# Altium PCB IDC_BNC_Adapter.PCBDOC
Units mil, origin at the board's own origin, x right, y up, seen from the top; angles counter-clockwise.
Board outline 2161.81 x 3942.37 mil, 4 copper layers (TopLayer, Internal Plane 2, Signal Layer 1, BottomLayer), stack 61.54 mil thick; 67 components, 53 nets, 158 pads, 33 vias.
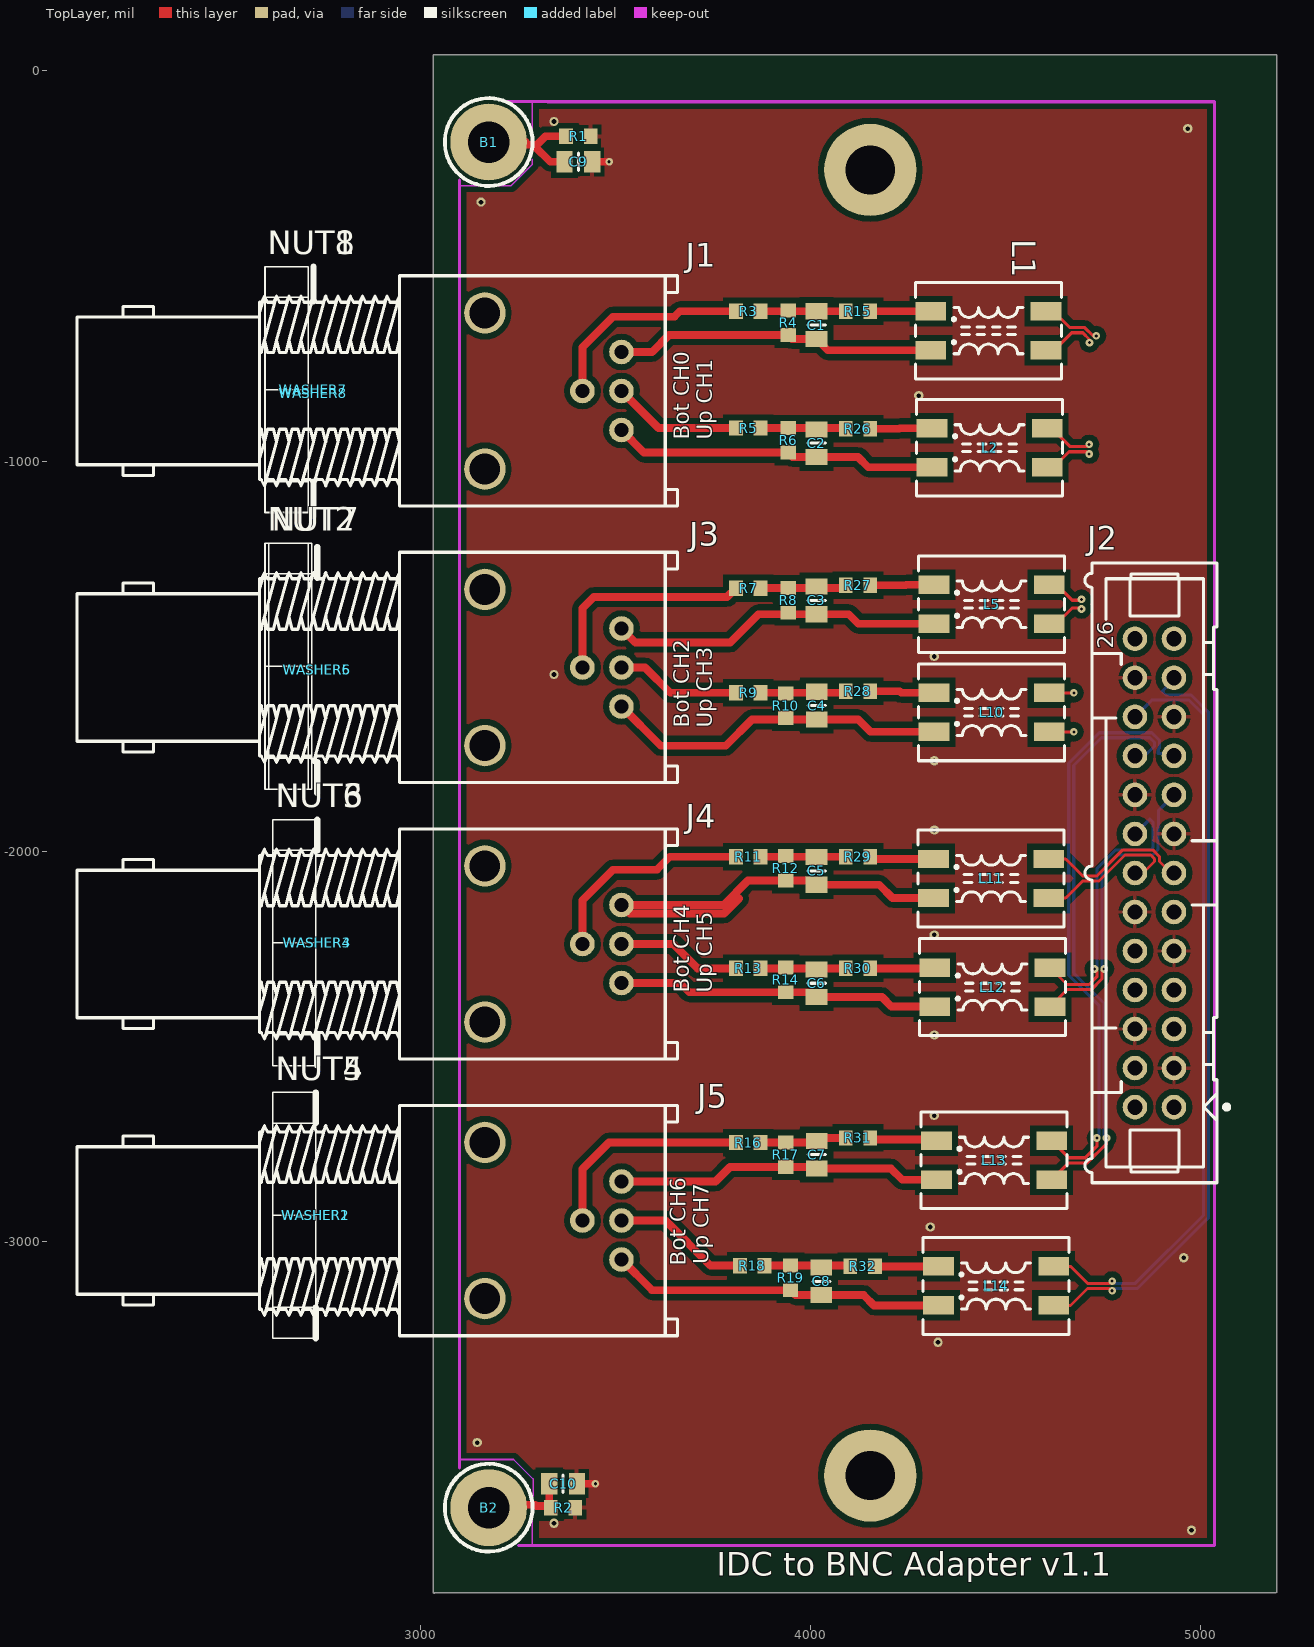
[diagram p0: TopLayer view]
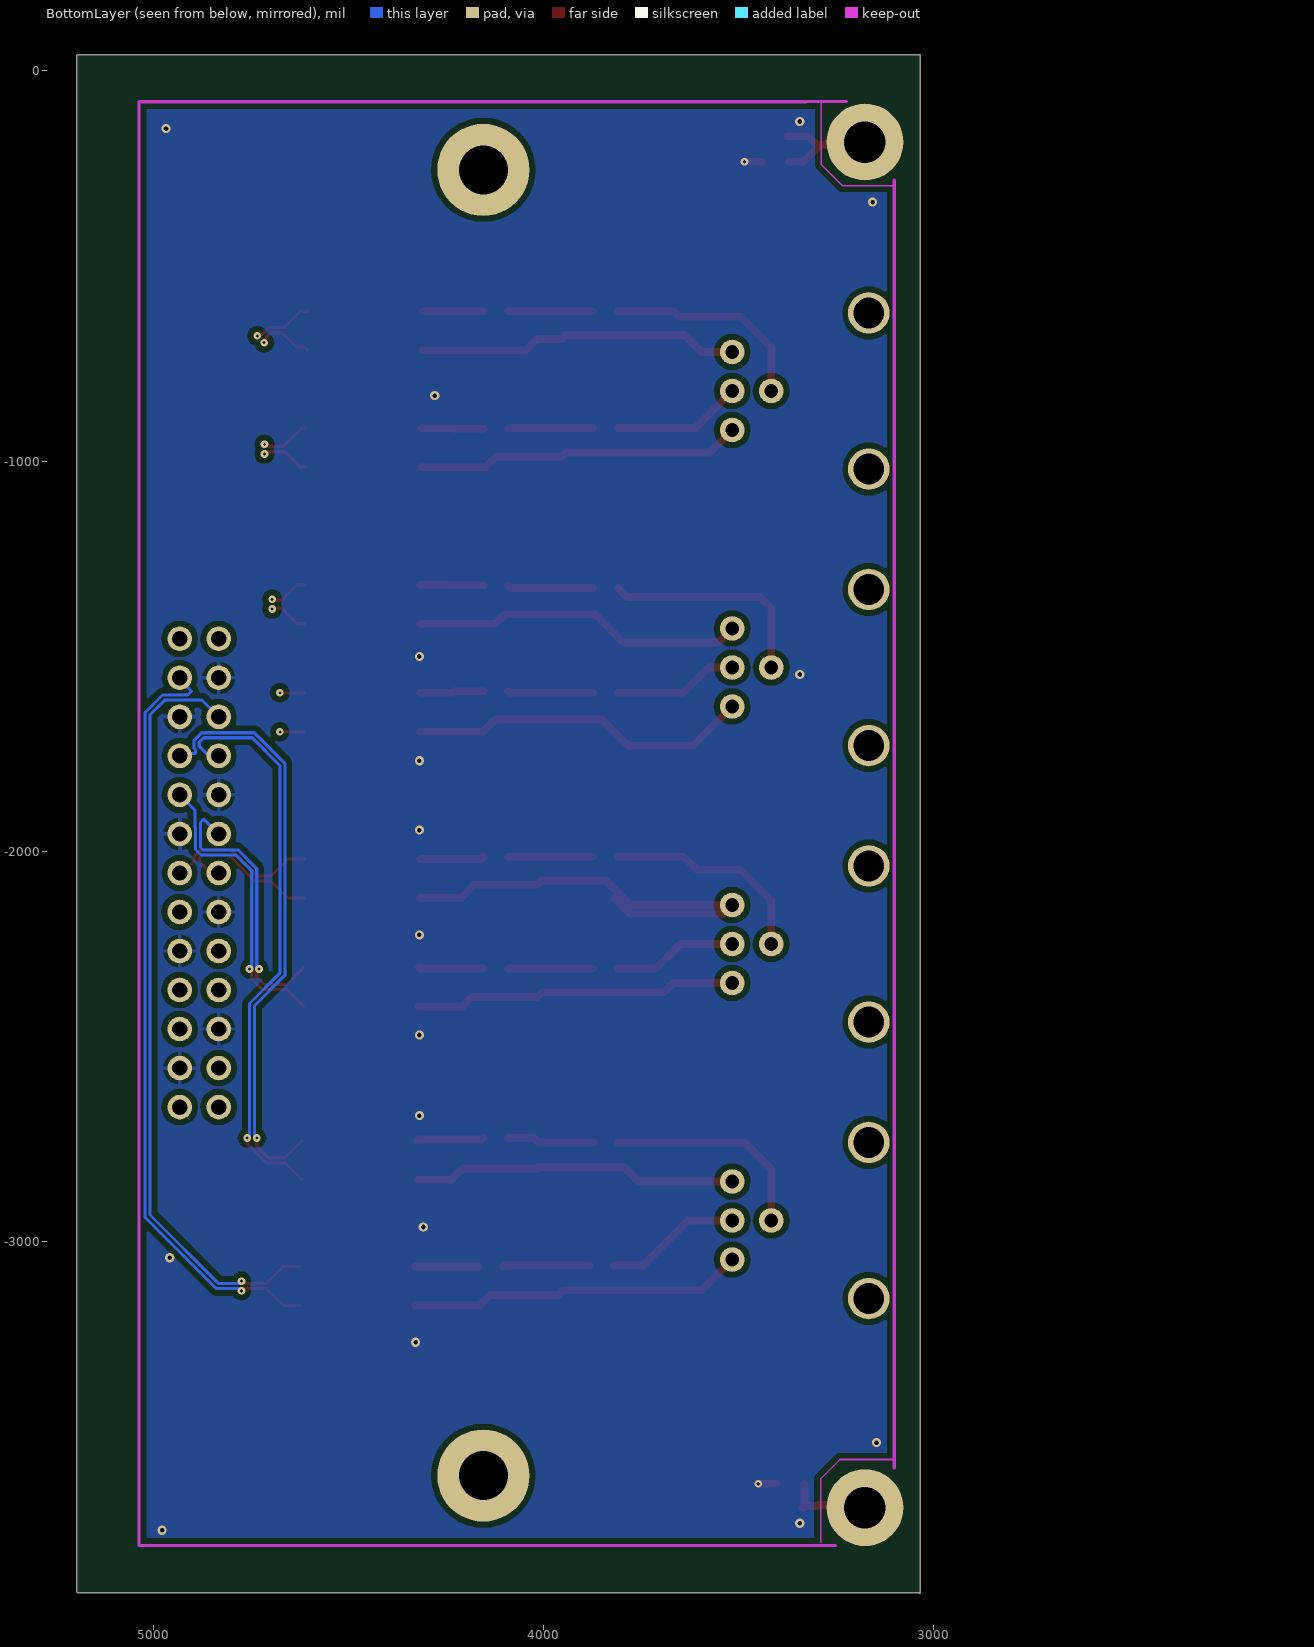
[diagram p1: BottomLayer view, seen from below]
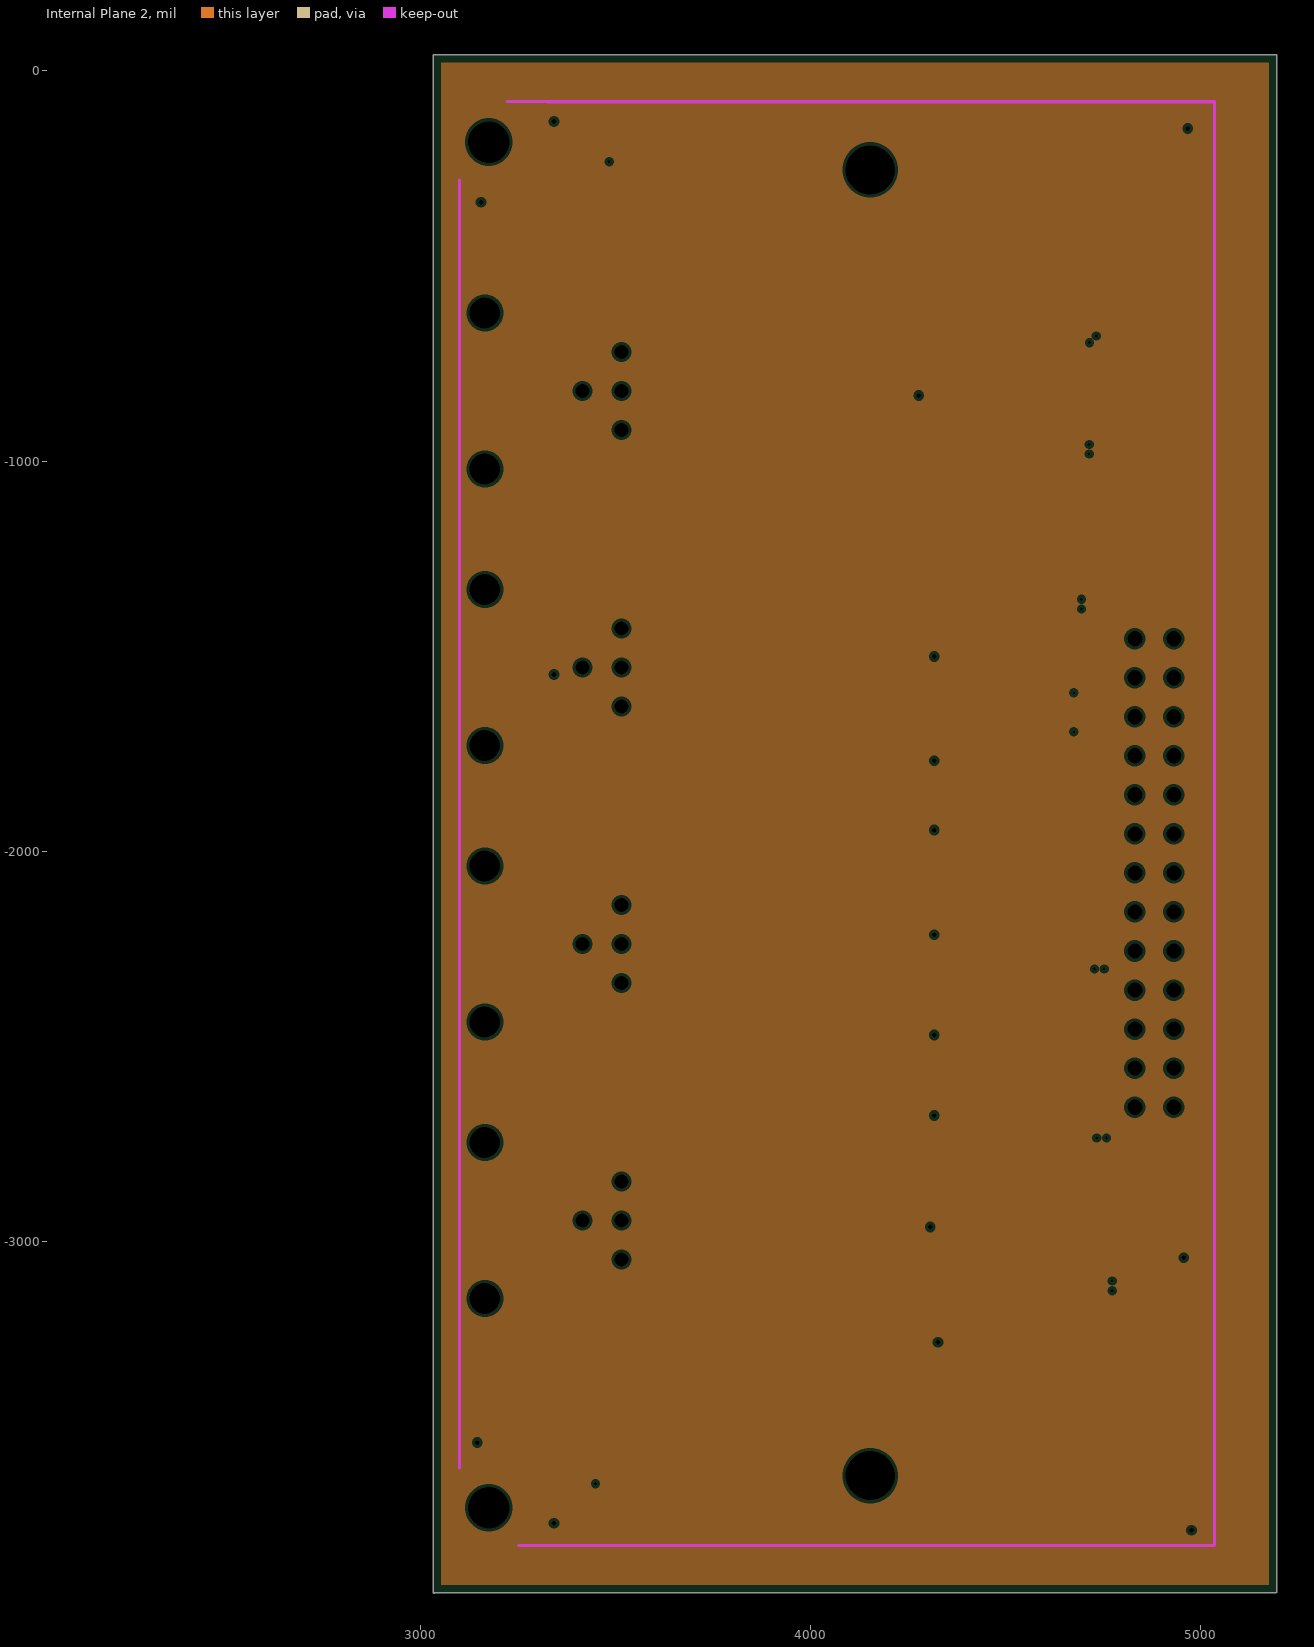
[diagram p2: Internal Plane 2, clearances drawn from the general rule]
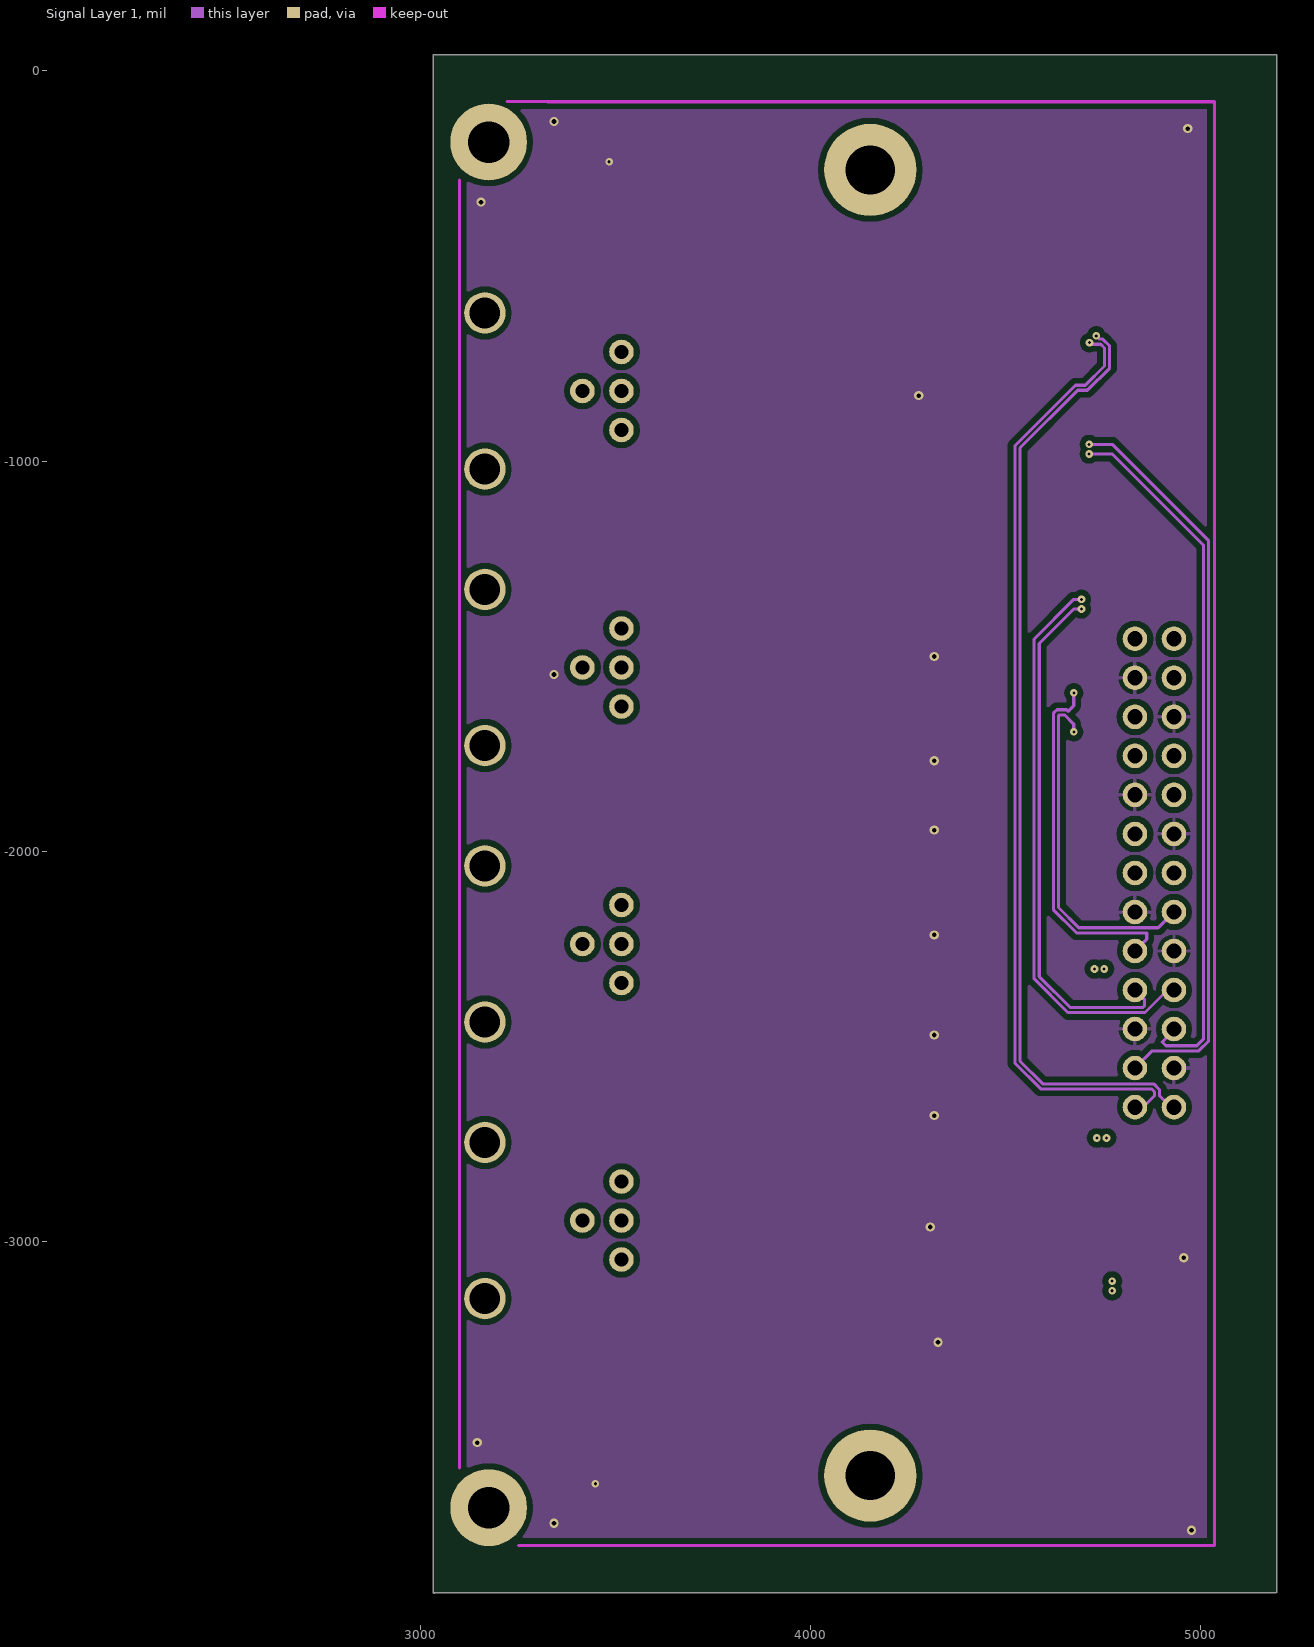
[diagram p3: Signal Layer 1]

## Layer stack, top to bottom
TopSolder: solder mask 0.4, Solder Resist, Dk 3.5
TopLayer: signal copper 1.4
Dielectric1: core 14.1732, FR-4, Dk 4.8
Internal Plane 2: plane copper 1.4169
Dielectric 3: prepreg 27.5591, Dk 4.2
Signal Layer 1: signal copper 1.4173
Dielectric 5: core 14.1732, Dk 4.2
BottomLayer: signal copper 1.4
BottomSolder: solder mask 0.4, Solder Resist, Dk 3.5

## Board outline
3033.55,-3899.4 3033.55,37.6 cw(c3035.54,37.6) 3033.68,38.3 cw(c3035.54,39) 3035.54,40.99 5193.38,40.99 cw(c5193.38,39) 5195.36,39 5195.36,-3898 cw(c5193.38,-3898) 5193.38,-3899.98 3037.43,-3899.98 cw(c3035.54,-3899.4)

## Design rules (kind name [scope] priority, off if disabled: settings)
Clearance Clearance_DIFF [(InDifferentialPairClass('All Differential Pairs')and IsTrack ) vs (InDifferentialPairClass('All Differential Pairs') and IsTrack  )] p1 off: gap=20 ignorepadtopadclearanceinfootprint=FALSE except(0: Arc-Hole Track-Hole SMDPad-Hole THPad-Hole Via-Hole Fill-Hole Poly-Hole Region-Hole Text-Hole; 5: SMDPad-SMDPad SMDPad-THPad SMDPad-Via SMDPad-Fill SMDPad-Poly SMDPad-Region SMDPad-Text THPad-THPad THPad-Via THPad-Fill THPad-Poly THPad-Region THPad-Text Via-Via Via-Fill Via-Poly Via-Region Via-Text)
Clearance [All] p2: gap=5 ignorepadtopadclearanceinfootprint=FALSE except(0: Arc-Hole Track-Hole SMDPad-Hole THPad-Hole Via-Hole Fill-Hole Poly-Hole Region-Hole Text-Hole; 15: Arc-Poly Track-Poly SMDPad-Poly THPad-Poly Via-Poly Fill-Poly Poly-Poly)
ComponentClearance [All] p1: gap=0 collisioncheckmode=3 verticalgap=100000 showdistances=FALSE
DiffPairsRouting [All] p1: maxlimit=6 minlimit=5 mostfreqgap=6 toplayer_minwidth=5 toplayer_maxwidth=6 toplayer_prefwidth=6 midlayer1_minwidth=5 midlayer1_maxwidth=6 midlayer1_prefwidth=6 bottomlayer_minwidth=5 bottomlayer_maxwidth=6 bottomlayer_prefwidth=6 maxuncoupledlength=500
FabricationTestPointUsage TestPointUsage [All] p1: valid=0 allowmultiple=FALSE
FabricationTestpoint Testpoint [All] p1: side=3 testpointundercomponent=TRUE minsize=40 maxsize=100 preferedsize=60 minholesize=20 maxholesize=40 preferedholesize=32 testpointgrid=1 allowsidetop=TRUE allowsidebottom=TRUE usegrid=TRUE gridtolerance=0.01
Height [All] p1: minheight=0 maxheight=1574.8 prefheight=1574.8
HoleSize [All] p1: absolutevalues=TRUE maxlimit=150 minlimit=1 maxpercent=80.000 minpercent=20.000
HoleToHoleClearance [All] p1: gap=1 allowstackedmicrovias=TRUE
MinimumSolderMaskSliver [All] p1: minsoldermaskwidth=0
PlaneClearance [All] p1: clearance=7.87
PlaneConnect [All] p1: planeconnectstyle=Direct reliefexpansion=20 reliefentries=4 reliefconductorwidth=10 reliefairgap=10
PolygonConnect PolygonConnect_pad [(InPadClass('All Pads'))] p1: connectstyle=Relief reliefconductorwidth=10 reliefentries=4 polygonreliefangle="90 Angle" airgapwidth=10
PolygonConnect [All] p2: connectstyle=Direct reliefconductorwidth=10 reliefentries=4 polygonreliefangle="45 Angle" airgapwidth=10
RoomDefinition IDC_BNC_Adapter [InComponentClass('IDC_BNC_Adapter')] p1: confinementstyle=ConfineIn formatcopy=TRUE lockcomponents=FALSE outline 4760.31,27.76 4661.88,27.76 4661.88,-612 4760.31,-612
RoutingVias [All] p1: holewidth=7.87 width=19.68 viastyle="Through Hole" minholewidth=7.87 minwidth=19.68 maxholewidth=28 maxwidth=50
SilkToSilkClearance [All] p1: silktosilkclearance=0
SilkToSolderMaskClearance SilkscreenOverComponentPads [IsPad] p1: minsilkscreentomaskgap=0 clearancetoexposedcopper=TRUE
SolderMaskExpansion [All] p1: expansion=2
ViasUnderSMD [All] p1: allowed=FALSE
Width [All] p1: maxlimit=50 minlimit=5 preferedwidth=5
18 further rules are at their usual default settings.

## Components (designator, comment, footprint, x,y, rotation, side; value= is the part's Value field where it differs from the comment)
B1 "Plated Hole" MTG270_500 3175.54,-182.4 r0 top
B2 "Plated Hole" MTG270_500 3175.54,-3682.4 r0 top locked
C1 "Undefined" CAPC2012X135N 4015.75,-651.63 r90 top
C2 "Undefined" CAPC2012X135N 4015.75,-954.19 r90 top
C3 "Undefined" CAPC2012X135N 4015.75,-1357.16 r90 top
C4 "Undefined" CAPC2012X135N 4016.08,-1626.76 r90 top
C5 "Undefined" CAPC2012X135N 4015.75,-2050.34 r90 top
C6 "Undefined" CAPC2012X135N 4015.75,-2338.34 r90 top
C7 "Undefined" CAPC2012X135N 4016.08,-2777.68 r90 top
C8 "Undefined" CAPC2012X135N 4027.9,-3102.24 r90 top
C9 "Undefined" CAPC2012X135N 3405.51,-232.85 r0 top
C10 "Undefined" CAPC2012X135N 3366.14,-3621.08 r0 top
J1 "BNC" RENHOTEC_RHT-610-0049 3271.76,-820.42 r180 top
J2 "Header 26" 3M_N2526-6003RB 4881.89,-2055.68 r90 top
J3 "BNC" RENHOTEC_RHT-610-0049 3271.75,-1529.09 r180 top
J4 "BNC" RENHOTEC_RHT-610-0049 3271.75,-2237.75 r180 top
J5 "BNC" RENHOTEC_RHT-610-0049 3271.75,-2946.41 r180 top
L1 "2x6.5mH" IND_WURTH_WE-SL2 4456.45,-666 r0 top
L2 "2x6.5mH" IND_WURTH_WE-SL2 4459.45,-966 r0 top
L5 "2x6.5mH" IND_WURTH_WE-SL2 4464.45,-1367 r0 top
L10 "2x6.5mH" IND_WURTH_WE-SL2 4464.45,-1644 r0 top
L11 "2x6.5mH" IND_WURTH_WE-SL2 4463.24,-2069.84 r0 top
L12 "2x6.5mH" IND_WURTH_WE-SL2 4466.45,-2348.19 r0 top
L13 "2x6.5mH" IND_WURTH_WE-SL2 4470.87,-2792.05 r0 top
L14 "2x6.5mH" IND_WURTH_WE-SL2 4475.87,-3114.05 r0 top
NUT1 "BNC Nut" TE_1-329631-2 2657.48,-816.93 r0 top
NUT2 "BNC Nut" TE_1-329631-2 2657.48,-1525.59 r0 top
NUT3 "BNC Nut" TE_1-329631-2 2677.17,-2234.25 r0 top
NUT4 "BNC Nut" TE_1-329631-2 2677.17,-2933.07 r0 top
NUT5 "BNC Nut" TE_1-329631-2 2677.17,-2933.07 r0 top
NUT6 "BNC Nut" TE_1-329631-2 2677.17,-2234.25 r0 top
NUT7 "BNC Nut" TE_1-329631-2 2667.32,-1525.59 r0 top
NUT8 "BNC Nut" TE_1-329631-2 2657.48,-816.93 r0 top
R1 "0" RESC1608X55N 3405.51,-167.32 r180 top
R2 "0" RESC1608X55N 3366.14,-3682.4 r180 top
R3 "0" RESC1608X55N 3840.6,-616 r0 top
R4 "Undefined" RESC1608X55N 3942.89,-645.53 r90 top
R5 "0" RESC1608X55N 3840.6,-915.43 r0 top
R6 "Undefined" RESC1608X55N 3942.89,-946.93 r90 top
R7 "0" RESC1608X55N 3840.6,-1325.66 r0 top
R8 "Undefined" RESC1608X55N 3942.89,-1357.16 r90 top
R9 "0" RESC1608X55N 3840.6,-1594 r0 top
R10 "Undefined" RESC1608X55N 3937.01,-1627.17 r90 top
R11 "0" RESC1608X55N 3840.6,-2014.08 r0 top
R12 "Undefined" RESC1608X55N 3937.34,-2043.61 r90 top
R13 "0" RESC1608X55N 3840.6,-2300.19 r0 top
R14 "Undefined" RESC1608X55N 3937.34,-2329.71 r90 top
R15 "0" RESC1608X55N 4122.05,-616 r0 top
R16 "0" RESC1608X55N 3840.6,-2746.63 r0 top
R17 "Undefined" RESC1608X55N 3937.34,-2777.68 r90 top
R18 "0" RESC1608X55N 3851.02,-3062.08 r0 top
R19 "Undefined" RESC1608X55N 3949.16,-3093.58 r90 top
R26 "0" RESC1608X55N 4122.05,-917.4 r0 top
R27 "0" RESC1608X55N 4122.05,-1318.4 r0 top
R28 "0" RESC1608X55N 4122.05,-1589.93 r0 top
R29 "0" RESC1608X55N 4122.05,-2014.08 r0 top
R30 "0" RESC1608X55N 4122.05,-2300.19 r0 top
R31 "0" RESC1608X55N 4122.05,-2734.82 r0 top
R32 "0" RESC1608X55N 4133.86,-3064.05 r0 top
WASHER1 "D15.8d12.75" TE_1-1634817-0 2732.28,-2933.07 r0 top
WASHER2 "D15.8d12.75" TE_1-1634817-0 2732.28,-2933.07 r0 top
WASHER3 "D15.8d12.75" TE_1-1634817-0 2736.22,-2234.25 r0 top
WASHER4 "D15.8d12.75" TE_1-1634817-0 2736.22,-2234.25 r0 top
WASHER5 "D15.8d12.75" TE_1-1634817-0 2736.22,-1535.43 r0 top
WASHER6 "D15.8d12.75" TE_1-1634817-0 2736.22,-1535.43 r0 top
WASHER7 "D15.8d12.75" TE_1-1634817-0 2726.38,-816.93 r0 top
WASHER8 "D15.8d12.75" TE_1-1634817-0 2726.38,-826.77 r0 top

## Footprints (in the part's own frame and the unit in brackets; to place one, negate y for a bottom-side part, rotate by r counter-clockwise, add the part's x,y. Pads: shape width x height; smd on the part's side, far side on the other; paste and mask are expansions set on the pad)
3M_N2526-6003RB [mm] "26 Contacts - Straight .100\" x .100\" Low Profile Four-Wall Header"
  round 1.6 hole 1: 1(-15.24,-1.27) 2(-15.24,1.27) 3(-12.7,-1.27) 4(-12.7,1.27) 5(-10.16,-1.27) 6(-10.16,1.27) 7(-7.62,-1.27) 8(-7.62,1.27) 9(-5.08,-1.27) 10(-5.08,1.27) 11(-2.54,-1.27) 12(-2.54,1.27) 13(0,-1.27) 14(0,1.27) 15(2.54,-1.27) 16(2.54,1.27) 17(5.08,-1.27) 18(5.08,1.27) 19(7.62,-1.27) 20(7.62,1.27) 21(10.16,-1.27) 22(10.16,1.27) 23(12.7,-1.27) 24(12.7,1.27) 25(15.24,-1.27) 26(15.24,1.27)
  silkscreen extent -20.17,-4.85 20.17,4.52, body extent -20.17,-4.11 20.17,4.52, height 9.91
CAPC2012X135N [mm] "Chip Capacitor, Body 2.0x1.25mm, IPC Medium Density"
  rect 1.05x1.4 smd: 1(-0.9,0) 2(0.9,0)
  silkscreen extent 0,-0.58 0,0.58, body extent -1.05,-0.67 1.05,0.68, height 1.25
IND_WURTH_WE-SL2 [mm] "Common Mode SMD Line Filter WE-SL2"
  rect 2x1.2 smd: 1(-3.75,1.27) 2(-3.75,-1.27) 3(3.75,-1.27) 4(3.75,1.27)
  silkscreen extent -4.75,-3.15 4.75,3.15, body extent -4.75,-3.15 4.75,3.15, height 5.3
MTG270_500 [mm] "Plated Through Hole: Hole Dia.=2.7mm Pad Dia.=5.0mm"
  round 5 hole 2.7: 1(0,0)
RENHOTEC_RHT-610-0049 [mm] "Dual Right Angle 50 Ohm BNC Jack, White Valox Case"
  round 1.6 hole 0.9: 1(-6.2,-2.54) 2(-6.2,0) 3(-6.2,2.54) 4(-3.66,0)
  round 2.7 hole 2: 6(2.69,-5.08) 7(2.69,5.08)
  silkscreen extent -9.85,-7.5 29.25,7.5, body extent -9.85,-7.5 29.25,7.5, height 29.3
RESC1608X55N [mm] "Chip Resistor, EIA 0603, Metric 1608, Body 1.6x0.8mm, IPC Medium Density"
  rect 0.9x1 smd: 1(-0.8,0) 2(0.8,0)
  body extent -0.87,-0.47 0.88,0.48, height 0.55
TE_1-329631-2 [mil]
  silkscreen extent -55,-315 55,315
TE_1-1634817-0 [mil]
  silkscreen extent 0,-315 0,315

## Part data
B1 B2: library part PLATED_HOLE2.7_PAD5.0, "Single Terminal Socket", Author="CERN DEM JMW", ComponentHeight=0mm, Component Type="Standard (No BOM)", CreateDate=27.09.2011, Family="Plated Hole", HelpURL=Undefined, LatestRevisionDate=27.09.2011, Mounted=No, PackageDescription="Plated Through Hole: Hole Dia.=2.7mm Pad Dia.=5.0mm", Part Description="Plated Through Hole: Hole Dia.=2.7mm Pad Dia.=5.0mm", Part Number=PLATED_HOLE2.7_PAD5.0, Pin Count=1, Sense=No, SMD=No, Socket=No, Status=None
C1 C2 C3 C4 C5 C6 C7 C8 C9 C10: library part CC0805_NO-VALUE, "Non-polarised capacitor", Case=0805, Manufacturer1 ComponentHeight=1.35mm, Author="CERN DEM JLC", Component Type=Standard, CreateDate=10.12.2008, HelpURL=Undefined, LatestRevisionDate=11.09.2013, Manufacturer=Undefined, Manufacturer Part Number=CC0805_NO-VALUE, Mounted=No, Part Description="Reserved Footprint For 0805(2012) Chip Ceramic Capacitor", Part Number=CC0805_NO-VALUE, Pin Count=2, Sense=No, SMD=Yes, Socket=No, Status=None
J1 J3 J4 J5: "Dual Right Angle 50 Ohm BNC Jack, White Valox Case", Manufacturer=RENHOTEC, Manufacturer Part Number=RHT-610-0049, Part Number=RENHOTEC_RHT-610-0049, Author=GK, ComponentHeight=29.3mm, Component Type=Standard, CreateDate=09.04.2013, Family=BNC, HelpURL=\\cern.ch\dfs\Applications\Altium\Datasheets\BOMAR_364A2595.pdf, LatestRevisionDate=09.04.2013, Mounted=Yes, Part Description="Dual Right Angle 50 Ohm BNC Jack, White Valox Case", Pin Count=6, PressFit=No, Sense=No, SMD=No, Socket=No, Status=None
J2: library part 3M_N2526-6003RB, "Connector 26 Male", Manufacturer=3M, Manufacturer Part Number=N2526-6003RB, Author="CERN DEM JLC", ComponentHeight=9.91mm, Component Type=Standard, CreateDate=22.01.2014, Family="Header 26", HelpURL=\\cern.ch\dfs\Applications\Altium\Datasheets\3M_N2526-6003RB.pdf, LatestRevisionDate=22.01.2014, Mounted=Yes, Part Description="26 Contacts - Straight .100'' x .100'' Low Profile Four-Wall Header, 2500 Series", Part Number=3M_N2526-6003RB, Pin Count=26, PressFit=No, Sense=No, SMD=No, Socket=No, Status=None
L1 L2 L5 L10 L11 L12 L13 L14: library part IND_6.5MH_50%_WURTH_WE-SL2-744229, "Inductor Common Mode", Manufacturer="WURTH ELEKTRONIK", Manufacturer Part Number=744229, Power=400mA, Resistance=0.95R, Tolerance=±50%, Author="CERN DEM JLC", ComponentHeight=5.3mm, Component Type=Standard, CreateDate=01.10.2012, HelpURL=\\cern.ch\dfs\Applications\Altium\Datasheets\IND_WURTH_WE-SL2_744229.pdf, LatestRevisionDate=15.10.2012, Mounted=Yes, Part Description="Common Mode SMD Line Filter (WE-SL2 Serie)", Part Number=IND_6.5MH_50%_WURTH_WE-SL2-744229, Pin Count=4, Sense=No, SMD=Yes, Socket=No, Status=None
NUT1 NUT2 NUT3 NUT4 NUT5 NUT6 NUT7 NUT8: "BNC nut", Manufacturer=TE, Manufacturer Part Number=1-329631-2, Part Number=TE_1-329631-2, Author="CERN DEM JLC", ComponentHeight=3.2mm, Component Type=Mechanical, CreateDate=17.04.2014, HelpURL=\\cern.ch\dfs\Applications\Altium\Datasheets\BOSSARD_BN81-1400428.pdf, LatestRevisionDate=17.04.2014, Mounted=Yes, PackageDescription="BNC NUT 1/2-28UNEF-2B", Part Description="BNC NUT 1/2-28UNEF-2B", Pin Count=0, PressFit=No, Sense=No, SMD=No, Socket=No, Status=None
R1 R2 R3 R5 R7 R9 R11 R13 R15 R16 R18 R26 R27 R28 R29 R30 R31 R32: library part R0603_0R_JUMPER, "Resistor", Case=0603, Manufacturer=GENERIC, Manufacturer1 ComponentHeight=0.55mm, Manufacturer1 Example="NIC COMPONENT", Manufacturer1 Part Number=NRC06Z0, Author="CERN DEM JLC", Component Type=Standard, CreateDate=03.12.2007, HelpURL=\\cern.ch\dfs\Applications\Altium\Datasheets\R0603_NIC_NRC.pdf, LatestRevisionDate=13.03.2008, Manufacturer Part Number=R0603_0R_JUMPER, Mounted=Yes, Part Description="1A (0.05R Max DC Resistance) Zero Ohm Jumper", Part Number=R0603_0R_JUMPER, Pin Count=2, Sense=No, SMD=Yes, Socket=No, Status=Preferred
  R1 R2: PressFit=No
R4 R6 R8 R10 R12 R14 R17 R19: library part R0603_NO-VALUE, "Resistor", Case=0603, Author="CERN DEM JLC", Component Type=Standard, CreateDate=03.12.2007, HelpURL=Undefined, LatestRevisionDate=13.03.2008, Manufacturer=Undefined, Manufacturer1 ComponentHeight=Undefined, Manufacturer1 Example=Undefined, Manufacturer1 Part Number=Undefined, Manufacturer Part Number=R0603_NO-VALUE, Mounted=No, Part Description="Reserved Footprint For a 0603 (1608) Chip Resistor", Part Number=R0603_NO-VALUE, Pin Count=2, PressFit=No, Sense=No, SMD=Yes, Socket=No, Status=None
WASHER1 WASHER2 WASHER3 WASHER4 WASHER5 WASHER6 WASHER7 WASHER8: "BNC Washer", Manufacturer=TE, Manufacturer Part Number=1-1634817-0, Part Number=TE_1-1634817-0, Author=GK, ComponentHeight=0.5mm, Component Type=Mechanical, CreateDate=27.04.2017, HelpURL=\\cern.ch\dfs\Applications\Altium\Datasheets\BOSSARD_BN83728-8243972.pdf, LatestRevisionDate=27.04.2017, Mounted=Yes, PackageDescription="BNC washer", Part Description="BNC washer", Pin Count=0, PressFit=No, Sense=No, SMD=No, Socket=No, Status=None

## Free pads (board coordinates)
  round 236.22 hole 125.98: 2(4153.65,-253.73) 3(4153.65,-3600.19)

## Via types
v1: diameter 23.62, hole 11.81, TopLayer to BottomLayer, tented both sides, 17 vias
v2: diameter 19.68, hole 7.87, TopLayer to BottomLayer, 16 vias

## Nets (pads, with @x,y where several pads share a name; then routed paths per layer and width w, separated by ;. In a path a pad name is that pad's centre, name@x,y a point inside that pad or via, vN(x,y) a via of type N, cw(c..) or ccw(c..) an arc to the next point about the centre after c; other vN are vias at no path point)
CH0: J1.4 R3.1 | length 543.7
  TopLayer w20: J1.4 3415.85,-708.17 3494.09,-629.92 3651.57,-629.92 3665.5,-616 R3.1
CH1: J1.2 R5.1 | length 332.6
  TopLayer w20: J1.2 3610.86,-915.43 R5.1
CH2: J3.4 R7.1 | length 566.3
  TopLayer w20: J3.4 3415.85,-1377.46 3444.88,-1348.43 3786.34,-1348.43 R7.1
CH3: J3.2 R9.1 | length 320.1
  TopLayer w20: J3.2 3576.33,-1529.09 3641.24,-1594 R9.1
CH4: J4.4 R11.1 | length 551.7
  TopLayer w20: J4.4 3415.85,-2125.49 3494.09,-2047.24 3606.7,-2047.24 3639.86,-2014.08 R11.1
CH5: J4.2 R13.1 | length 319.1
  TopLayer w20: J4.2 3648.19,-2237.75 3710.63,-2300.19 R13.1
CH6: J5.4 R16.1 | length 553.2
  TopLayer w20: J5.4 3415.85,-2814.59 3483.81,-2746.63 R16.1
CH7: J5.2 R18.1 | length 351.6
  TopLayer w20: J5.2 3628.61,-2946.41 3744.29,-3062.08 R18.1
GND: C9.2 C10.2 J2.3 J2.6 J2.9 J2.12 J2.15 J2.18 J2.21 J2.24 R1.1 R2.1 | length 90.8
  TopLayer w20: C10.2 v2(3449.01,-3621.08) ; C9.2 v2(3484.34,-232.84)
  other v1: 4976.84,-3740.52 3342.99,-3722.24 3146.14,-3515.55 4327.24,-3258.23 4957.16,-3041.7 4307.55,-2962.96 4317.4,-2677.53 4317.4,-2470.83 4317.4,-2214.33 4317.4,-1945.82 4317.4,-1768.01 3342.99,-1547.04 4317.4,-1500.86 4278.03,-832.14 3155.98,-336.41 4967,-148 3342.99,-129.72
IDC_N0: J2.2 L1.3 | length 2592.1
  TopLayer w8: L1.3 4612.83,-707.26 4633.62,-707.26 4669.83,-671.04 4698.04,-671.04 4715.36,-688.36 v2(4715.36,-696.62)
  Signal Layer 1 w8: v2(4715.36,-696.62) 4719.3,-700.57 4744.09,-700.57 4753.94,-710.41 4753.94,-756.47 4704.72,-805.68 4679.65,-805.68 4524.4,-960.93 4524.4,-2543.35 4590.23,-2609.18 4874.36,-2609.18 4881.89,-2616.7 4881.89,-2626.55 4852.75,-2655.68 J2.2
IDC_N1: J2.5 L2.3 | length 1944.7
  TopLayer w8: L2.3 4623.15,-1016 4662.99,-976.16 4708.72,-976.16 v2(4714.57,-982)
  Signal Layer 1 w8: v2(4714.57,-982) 4773.62,-982 5007.89,-1216.27 5007.89,-2480.86 4990.16,-2498.59 4911.42,-2498.59 4901.57,-2488.75 4931.89,-2458.44 J2.5
IDC_N2: J2.8 L5.3 | length 1454.3
  TopLayer w8: L5.3 4630.69,-1417 4671.14,-1376.55 4692.38,-1376.55 v2(4694.88,-1379.05)
  Signal Layer 1 w8: v2(4694.88,-1379.05) 4675.2,-1379.05 4586.61,-1467.63 4586.61,-2321.43 4665.35,-2400.17 4852.36,-2400.17 4856.69,-2395.84 4856.69,-2380.48 J2.8
IDC_N3: J2.11 L10.3 | length 959.2
  TopLayer w8: L10.3 v2(4675.2,-1694)
  Signal Layer 1 w8: v2(4675.2,-1694) 4675.2,-1674.24 4651.46,-1650.5 4637.47,-1650.5 4635.83,-1652.14 4635.83,-2144.26 4687.74,-2196.18 4891.39,-2196.18 J2.11
IDC_N4: J2.14 L11.3 | length 389.7
  TopLayer w8: L11.3 4654.25,-2119.84 4697.75,-2076.34 4739.64,-2076.34 4806.35,-2009.63 4872.05,-2009.63 4881.89,-2019.47 4881.89,-2026.15 4852.36,-2055.68 J2.14
IDC_N5: J2.17 L12.3 | length 768.9
  TopLayer w8: L12.3 4657.59,-2354.69 4719.95,-2354.69 4747.25,-2327.39 4747.25,-2307.59 v2(4753.09,-2301.74)
  BottomLayer w8: v2(4753.09,-2301.74) 4747.25,-2295.9 4747.25,-2050.34 4787.97,-2009.63 4877.43,-2009.63 4891.39,-1995.67 4891.39,-1938.91 4893.81,-1936.49 4892.6,-1935.28 4892.6,-1894.97 J2.17
IDC_N6: J2.20 L13.3 | length 1494.1
  TopLayer w8: L13.3 4662.01,-2798.55 4710.11,-2798.55 4758.94,-2749.73 v2(4758.94,-2734.82)
  BottomLayer w8: v2(4758.94,-2734.82) 4753.09,-2728.97 4753.09,-2390.32 4675.2,-2312.42 4675.2,-1780.09 4746.11,-1709.18 4870.03,-1709.18 4881.89,-1721.04 4881.89,-1730.88 4857.09,-1755.68 J2.20
IDC_N7: J2.23 L14.3 | length 1977.7
  TopLayer w8: L14.3 4666.88,-3164.05 4710.38,-3120.55 4767.78,-3120.55 v2(4773.62,-3126.4)
  BottomLayer w8: v2(4773.62,-3126.4) 4779.46,-3120.55 4838.06,-3120.55 5020.89,-2937.73 5020.89,-1644.8 4979.67,-1603.58 4975.86,-1599.77 4911.42,-1599.77 4901.57,-1589.93 4931.89,-1559.61 J2.23
IDC_P0: J2.1 L1.4 | length 2594.6
  TopLayer w8: L1.4 4623.31,-616 4665.35,-658.04 4703.42,-658.04 4724.55,-679.17 v2(4732.81,-679.17)
  Signal Layer 1 w8: v2(4732.81,-679.17) 4741.21,-687.57 4749.48,-687.57 4766.94,-705.03 4766.94,-761.85 4710.11,-818.68 4685.04,-818.68 4537.4,-966.32 4537.4,-2537.96 4595.62,-2596.18 4879.75,-2596.18 4894.89,-2611.32 4894.89,-2626.55 4924.02,-2655.68 J2.1
IDC_P1: J2.4 L2.4 | length 2037.6
  TopLayer w8: L2.4 4618.98,-916 4666.14,-963.16 4708.72,-963.16 v2(4714.57,-957.32)
  Signal Layer 1 w8: v2(4714.57,-957.32) 4773.62,-957.32 5020.89,-1204.59 5020.89,-2486.25 4995.54,-2511.59 4875.97,-2511.59 J2.4
IDC_P2: J2.7 L5.4 | length 1552.4
  TopLayer w8: L5.4 4631.28,-1317 4671.14,-1356.86 4692.38,-1356.86 v2(4694.88,-1354.36)
  Signal Layer 1 w8: v2(4694.88,-1354.36) 4675.2,-1354.36 4573.61,-1455.95 4573.61,-2326.81 4659.97,-2413.17 4857.75,-2413.17 4915.23,-2355.68 J2.7
IDC_P3: J2.10 L10.4 | length 985.7
  TopLayer w8: L10.4 v2(4675.2,-1594)
  Signal Layer 1 w8: v2(4675.2,-1594) 4675.2,-1626.76 4660.65,-1641.31 4656.84,-1637.5 4632.08,-1637.5 4628.27,-1641.31 4626.63,-1642.95 4622.83,-1646.75 4622.83,-2149.65 4679.65,-2206.48 4682.36,-2209.18 4862.2,-2209.18 4862.2,-2225.36 J2.10
IDC_P4: J2.13 L11.4 | length 398.2
  TopLayer w8: L11.4 4654.25,-2019.84 4697.75,-2063.34 4734.25,-2063.34 4800.97,-1996.63 4877.43,-1996.63 4894.89,-2014.08 4894.89,-2026.15 4924.42,-2055.68 J2.13
IDC_P5: J2.16 L12.4 | length 724.5
  TopLayer w8: L12.4 4657.59,-2341.69 4714.57,-2341.69 4734.25,-2322 4734.25,-2307.59 v2(4728.41,-2301.74)
  BottomLayer w8: v2(4728.41,-2301.74) 4734.25,-2295.9 4734.25,-2044.96 4782.58,-1996.63 4872.05,-1996.63 4878.39,-1990.28 4878.39,-1926.52 4869.76,-1917.89 4831.96,-1955.68 J2.16
IDC_P6: J2.19 L13.4 | length 1513.9
  TopLayer w8: L13.4 4662.01,-2785.55 4704.72,-2785.55 4734.25,-2756.03 v2(4734.25,-2734.82)
  BottomLayer w8: v2(4734.25,-2734.82) 4740.09,-2728.97 4740.09,-2395.7 4662.2,-2317.81 4662.2,-1774.71 4740.72,-1696.18 4875.42,-1696.18 4891.08,-1711.84 4894.89,-1715.65 4894.89,-1736.26 4891.08,-1740.07 4891.73,-1740.72 4891.73,-1749.91 4926.12,-1749.91 J2.19
IDC_P7: J2.22 L14.4 | length 1971.3
  TopLayer w8: L14.4 4666.88,-3064.05 4710.38,-3107.55 4767.78,-3107.55 v2(4773.62,-3101.71)
  BottomLayer w8: v2(4773.62,-3101.71) 4779.46,-3107.55 4832.68,-3107.55 5007.89,-2932.34 5007.89,-1650.19 4970.47,-1612.77 4874.8,-1612.77 J2.22
N13V0_SCSI: J2.26
NetB1_1: B1.1 C9.1 R1.2 | length 310.1
  TopLayer w20: B1.1 3270.43,-182.4 3270.43,-184.19 3275.4,-189.16 3299.4,-189.16 ; C9.1 3333.14,-232.85 3294.43,-194.13 3299.4,-189.16 ; R1.2 3321.24,-167.32 3299.4,-189.16
NetB2_1: B2.1 C10.1 R2.2 | length 218.2
  TopLayer w20: B2.1 3233.95,-3682.4 3241.4,-3674.95 3294.43,-3674.95 3297.95,-3678.47 3330.71,-3678.47 R2.2 ; R2.2@3330.71,-3674.95 C10.1@3330.71,-3622.05
NetC1_1: C1.1 J1.1 L1.2 R4.1 | length 827.1
  TopLayer w20: J1.1 3594.44,-720.42 3637.83,-677.02 R4.1 3952.93,-687.06 C1.1 4044.69,-716 L1.2
NetC1_2: C1.2 R3.2 R4.2 R15.1 | length 218.5
  TopLayer w20: R3.2 R15.1
NetC2_1: C2.1 J1.3 L2.2 R6.1 | length 835.6
  TopLayer w20: J1.3 3573.86,-978.43 R6.1 3954.08,-989.62 C2.1 4122.05,-989.62 4148.43,-1016 L2.2
NetC2_2: C2.2 R5.2 R6.2 R26.1 | length 219.3
  TopLayer w20: R5.2 R6.2 4088.58,-915.43 R26.1
NetC3_1: C3.1 J3.1 L5.2 R8.1 | length 855.8
  TopLayer w20: J3.1 3551.6,-1464.84 3794.75,-1464.84 3867,-1392.59 C3.1 4098.27,-1392.59 4122.68,-1417 L5.2
NetC3_2: C3.2 R7.2 R8.2 R27.1 | length 221.5
  TopLayer w20: R7.2 R8.2 4083.3,-1325.66 R27.1
NetC4_1: C4.1 J3.3 L10.2 R10.1 | length 883.9
  TopLayer w20: J3.3 3616.6,-1729.84 3782.75,-1729.84 3850.39,-1662.19 C4.1 4122.53,-1662.19 4154.33,-1694 L10.2
NetC4_2: C4.2 R9.2 R10.2 R28.1 | length 220.1
  TopLayer w20: R9.2 4086.48,-1594 R28.1
NetC5_1: C5.1 J4.1 L11.2 R12.1 | length 1170.4
  TopLayer w20: 3816.97,-2121.25 3778.54,-2159.68 3537.78,-2159.68 J4.1 3777.66,-2137.75 3840.3,-2075.11 R12.1 4005.08,-2075.11 C5.1 4176.6,-2085.77 4210.67,-2119.84 L11.2
NetC5_2: C5.2 R11.2 R12.2 R29.1 | length 218.5
  TopLayer w20: R11.2 R29.1
NetC6_1: C6.1 J4.3 L12.2 R14.1 | length 828
  TopLayer w20: J4.3 3666.5,-2337.75 3689.96,-2361.21 R14.1 4003.18,-2361.21 C6.1 4183.47,-2373.78 4207.88,-2398.19 L12.2
NetC6_2: C6.2 R13.2 R14.2 R30.1 | length 218.5
  TopLayer w20: R13.2 R30.1
NetC7_1: C7.1 J5.1 L13.2 R17.1 | length 836.4
  TopLayer w20: J5.1 3756.8,-2846.41 3794.03,-2809.18 R17.1 4012.15,-2809.18 C7.1 4206.43,-2813.12 4235.36,-2842.05 L13.2
NetC7_2: C7.2 R16.2 R17.2 R31.1 | length 223.3
  TopLayer w20: R16.2 3872.54,-2746.19 R17.2 4012.15,-2746.19 C7.2 4023.52,-2734.82 R31.1
NetC8_1: C8.1 J5.3 L14.2 R19.1 | length 861.1
  TopLayer w20: J5.3 3594.52,-3125.08 R19.1 3961.75,-3137.68 C8.1 4136.94,-3137.68 4163.31,-3164.05 L14.2
NetC8_2: C8.2 R18.2 R19.2 R32.1 | length 220.7
  TopLayer w20: R18.2 R19.2 4100.39,-3062.08 R32.1
NetL1_1: L1.1 R15.2 | length 155.3
  TopLayer w20: R15.2 L1.1
NetL2_1: L2.1 R26.2 | length 158.9
  TopLayer w20: R26.2 4227.54,-917.4 4228.95,-916 L2.1
NetL5_1: L5.1 R27.2 | length 163.9
  TopLayer w20: R27.2 4244.42,-1318.4 4245.83,-1317 L5.1
NetL10_1: L10.1 R28.2 | length 165
  TopLayer w20: R28.2 4228.87,-1589.93 4232.95,-1594 L10.1
NetL11_1: L11.1 R29.2 | length 164.4
  TopLayer w20: R29.2 4159.3,-2019.84 L11.1
NetL12_1: L12.1 R30.2 | length 166.1
  TopLayer w20: R30.2 4316.81,-2300.19 L12.1
NetL13_1: L13.1 R31.2 | length 172.7
  TopLayer w20: R31.2 4157.78,-2739.05 4320.23,-2739.05 L13.1
NetL14_1: L14.1 R32.2 | length 162.9
  TopLayer w20: R32.2 L14.1
P13V0_SCSI: J2.25
pads on no net: J1.6 J1.7 J3.6 J3.7 J4.6 J4.7 J5.6 J5.7

## Polygon pours and split planes (outlines as drawn)
GND on Signal Layer 1 "L3-No Net" (solid, remove dead copper, pour order 64): 3035.54,-3899.4 3035.54,37.6 5193.38,37.6 5193.38,-3899.4
GND on BottomLayer "L3-No Net" (solid, remove dead copper, pour order 66): 3035.54,-3899.4 3035.54,37.6 5193.38,37.6 5193.38,-3899.4
GND on TopLayer "L3-No Net" (solid, remove dead copper, pour order 68): 3035.54,-3899.4 3035.54,37.6 5193.38,37.6 5193.38,-3899.4
no net on Internal Plane 2 (split plane): 5175.27,-3879.88 3053.65,-3879.88 3053.65,20.89 5175.27,20.89

## Keep-outs
TopLayer:
  lines w3.94: 3100.39,-3558.93 3239.52,-3558.93 3289.24,-3608.65 3289.24,-3653.41 ; 3100.39,-294.1 3233.56,-294.1 3287.4,-240.26 3287.4,-226.38 ; 3287.4,-3780.4 3287.4,-3691.92 ; 3287.4,-172.32 3287.4,-80.4
BottomLayer:
  lines w3.94: 3100.39,-3558.93 3239.52,-3558.93 3289.24,-3608.65 3289.24,-3771.52 ; 3100.39,-294.1 3233.56,-294.1 3287.4,-240.26 3287.4,-80.4
KeepOutLayer:
  lines w8: 3100.54,-3580.4 3100.54,-280.4 ; 3222.79,-78.74 3326.77,-78.74 3326.51,-79 5035.9,-79 5035.9,-3779 3251.75,-3779

## Silkscreen, mask and mechanical layers (free items; w line width, h text height)
TopOverlay:
  circle w10: c3175.54,-3682.4 r112.5
  circle w10: c3175.54,-182.4 r112.5
  text "Bot CH0" at 3689.96,-945.87 h40 r90
  text "Up CH1" at 3749.02,-945.87 h40 r90
  text "Bot CH2" at 3689.96,-1684.06 h40 r90
  text "Up CH3" at 3749.02,-1684.06 h40 r90
  text "Bot CH4" at 3689.96,-2363.19 h40 r90
  text "Up CH5" at 3749.02,-2363.19 h40 r90
  text "Up CH7" at 3740.16,-3058.51 h40 r90
  text "Bot CH6" at 3681.1,-3062.45 h40 r90
  text "IDC to BNC Adapter v1.1" at 3759.84,-3856.86 h60
Mechanical1:
  lines w3.94: 3035.54,-3899.4 3035.54,37.6 ; 3035.54,-3898 5193.38,-3898 5193.38,-2244.47 5193.38,-1850.76 5193.38,39 3035.54,39

## Text inside footprints (layer, text, board x,y; h text height)
J2: TopOverlay "26" at 4776.89,-1480.68 h40 r90; Mechanical14 "26" at 4776.89,-1480.68 h40 r90